# Altium PCB PCB1.PcbDoc
Units mm, origin at the board's own origin, x right, y up, seen from the top; angles counter-clockwise.
Board outline 135.89 x 111.51 mm, 2 copper layers (Top Layer, Bottom Layer); 33 components, 37 nets, 124 pads, 30 vias.
Unrouted connection lines stored in the file: 28.
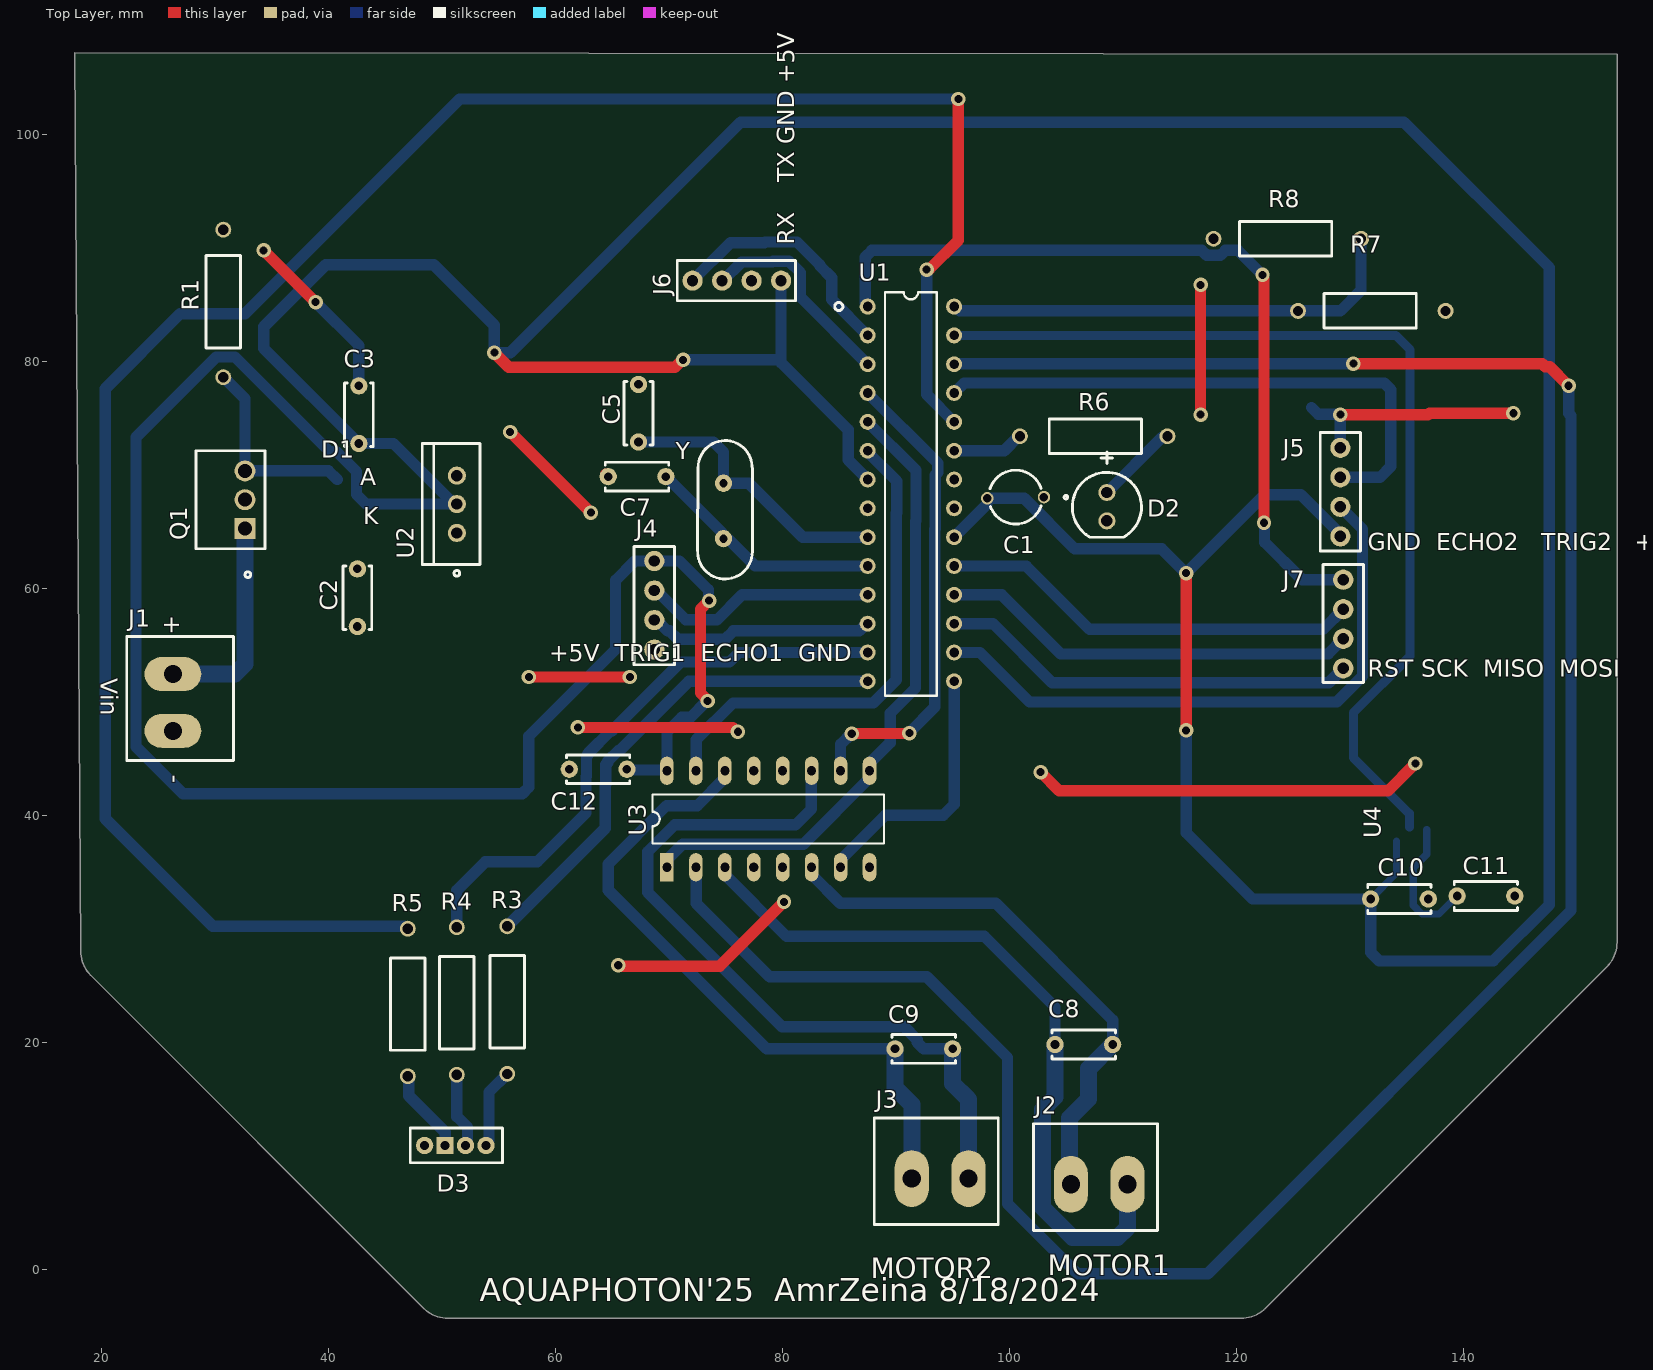
[diagram p0: Top Layer view]
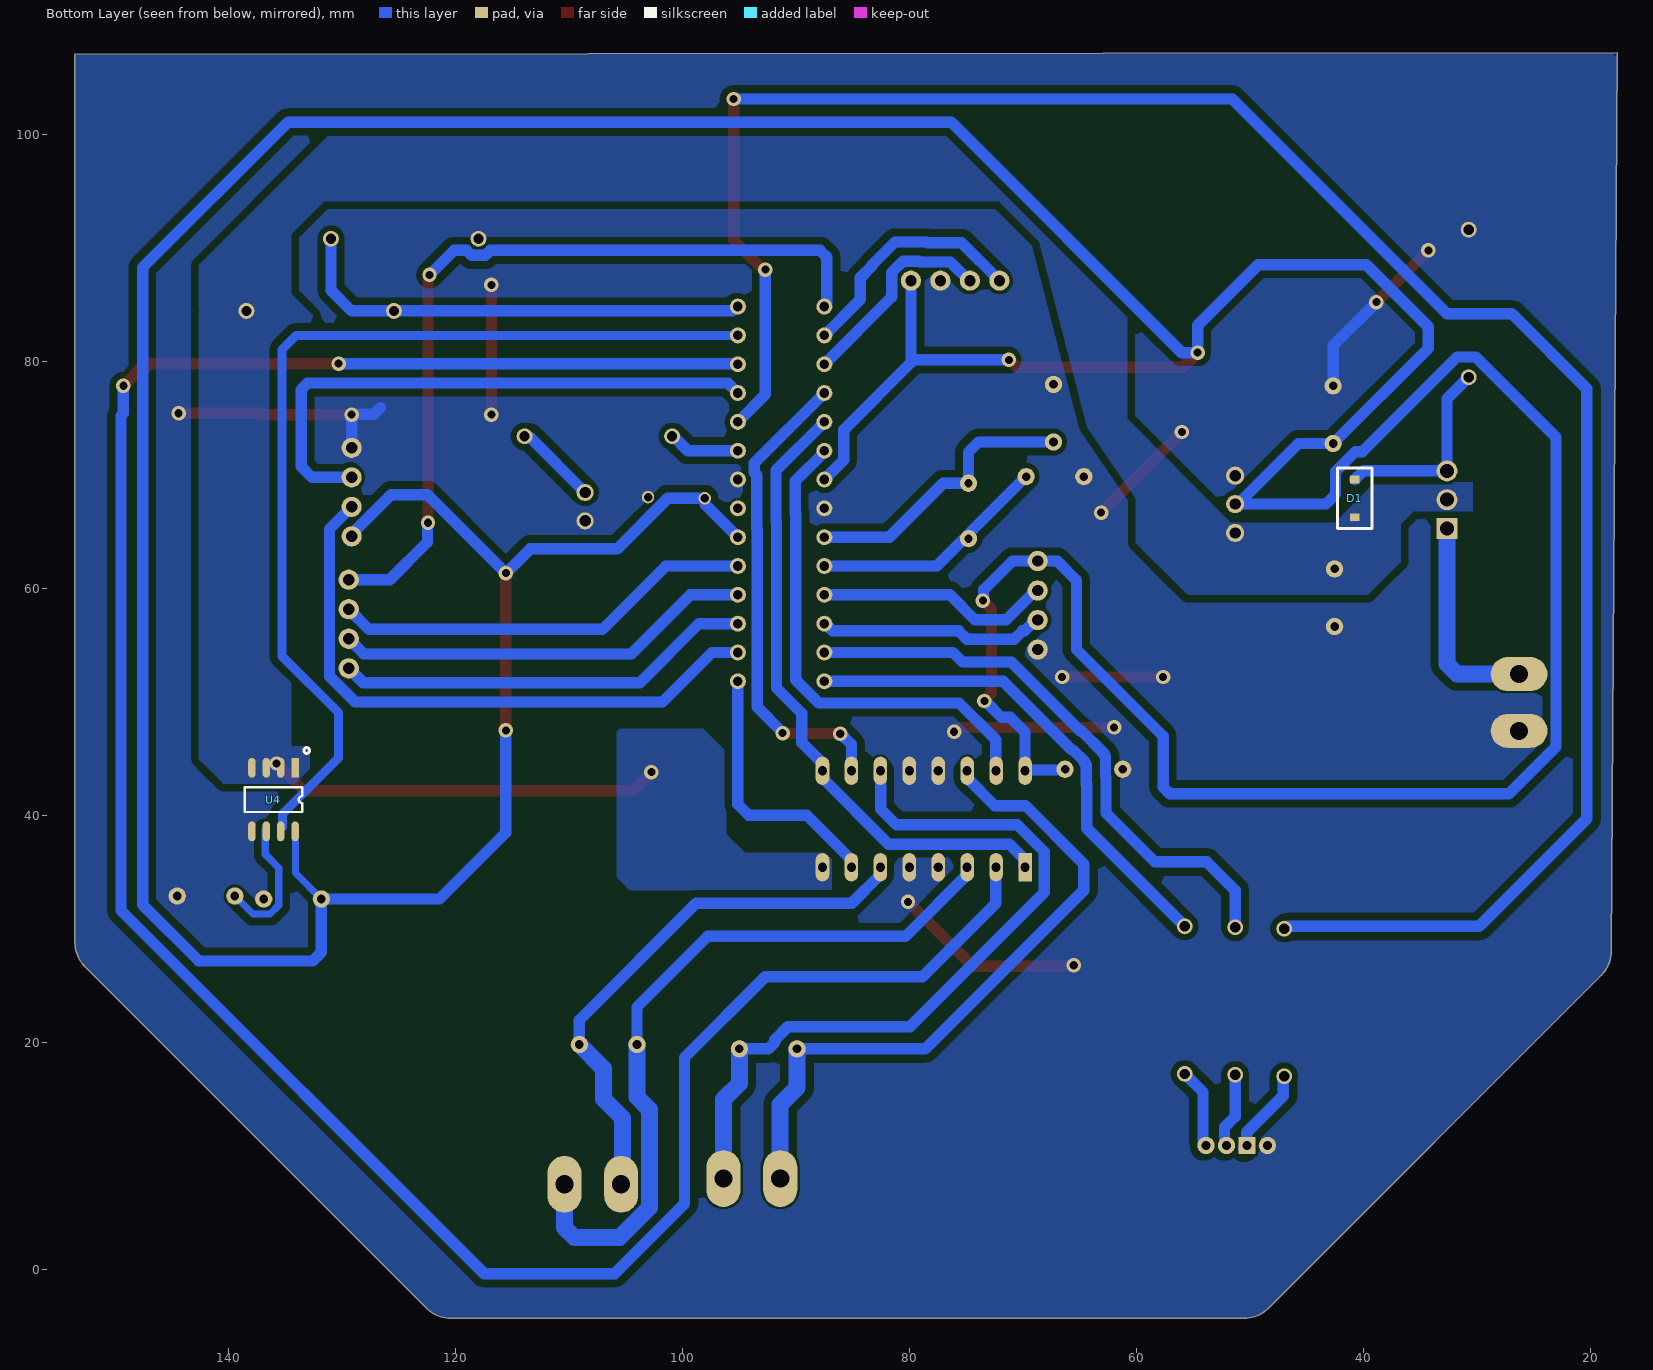
[diagram p1: Bottom Layer view, seen from below]
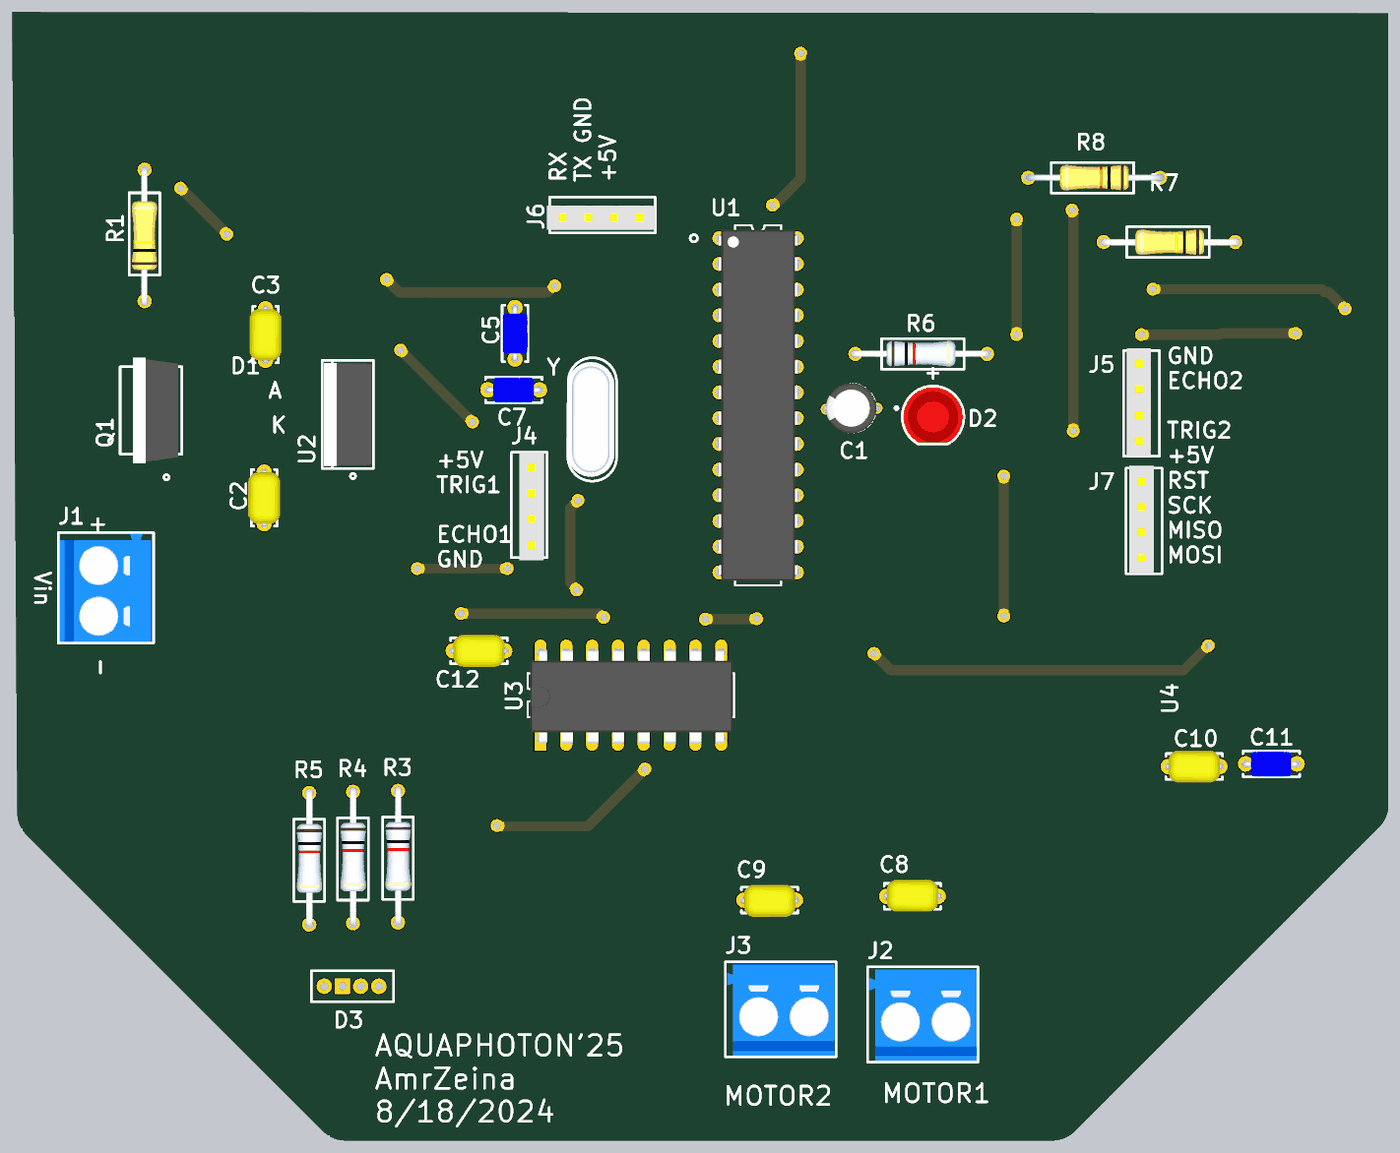
[diagram p2: 3D render of the assembled board from above, using the file's embedded part models]

## Layer stack, top to bottom
Top Solder: solder mask 0.0102, Solder Resist, Dk 3.5
Top Layer: signal copper 0.0356
Dielectric 1: dielectric 0.32, FR-4, Dk 4.8
Bottom Layer: signal copper 0.0356
Bottom Solder: solder mask 0.0102, Solder Resist, Dk 3.5

## Board outline
19.059,25.899 48.378,-3.42 ccw(c50.546,-1.252) 50.546,-4.318 120.396,-4.318 ccw(c120.396,-1.252) 122.564,-3.42 152.645,26.661 ccw(c150.477,28.829) 153.543,28.829 153.543,107.061 17.653,107.188 18.161,28.067 ccw(c21.227,28.067)

## Design rules (kind name [scope] priority, off if disabled: settings)
Clearance [All] p1: gap=0.254 ignorepadtopadclearanceinfootprint=FALSE except(0.2: THPad-Fill THPad-Poly THPad-Region; 0.7: Arc-Arc Arc-Track Arc-Fill Arc-Poly Arc-Region Track-Track Track-Fill Track-Poly Track-Region Fill-Fill Fill-Poly Fill-Region Poly-Poly Poly-Region Region-Region)
PlaneConnect [All] p1: planeconnectstyle=Direct reliefexpansion=0.508 reliefentries=4 reliefconductorwidth=0.254 reliefairgap=0.254
PolygonConnect [All] p1: connectstyle=Direct reliefconductorwidth=0.254 reliefentries=4 polygonreliefangle="90 Angle" airgapwidth=0.254
RoutingVias [All] p1: holewidth=0.711 width=1.27 viastyle="Through Hole" minholewidth=0.711 minwidth=1.27 maxholewidth=0.711 maxwidth=1.27
SolderMaskExpansion [All] p1: expansion=0.102 istentingtop=FALSE
SupplyNets "Schematic Supply Nets_5" [InNet('Vin')] p1: voltage=0.000
SupplyNets "Schematic Supply Nets_4" [InNet('VCC')] p2: voltage=0.000
SupplyNets "Schematic Supply Nets_2" [InNet('+5V')] p3: voltage=0.000
SupplyNets "Schematic Supply Nets" [InNet('GND')] p4: voltage=0.000
Width [All] p1: maxlimit=1.5 minlimit=0.635 preferedwidth=1 minimp=50.000000 maximp=50.000000 favimp=50.000000
29 further rules are at their usual default settings.

## Components (designator, comment, footprint, x,y, rotation, side; value= is the part's Value field where it differs from the comment)
C1 "CAP 10uF" "Cap 10uF" 103.044,68.047 r180 top
C2 "Cap 0.1uF" "CAP 0.1uF" 42.545,56.642 r90 top
C3 "Cap 0.1uF" "CAP 0.1uF" 42.672,77.851 r270 top
C5 "CAP 22pF" "Cap 22pF" 67.31,77.978 r270 top
C7 "CAP 22pF" "Cap 22pF" 64.643,69.85 r0 top
C8 "CAP 30pF" "CAP 30pF" 109.093,19.812 r180 top
C9 "CAP 30pF" "CAP 30pF" 89.916,19.431 r0 top
C10 "Cap 0.1uF" "CAP 0.1uF" 136.906,32.639 r180 top
C11 "CAP 1nF" "CAP 1nF" 144.526,32.893 r180 top
C12 "Cap 0.1uF" "CAP 0.1uF" 61.214,44.069 r0 top
D1 "1N5819 SMD Diode" "1N5819 SMD Diode" 40.767,76.454 r270 bottom
D2 "LED" LED 108.585,68.453 r270 top
D3 "RGB LED" "RGB LED" 48.47,10.922 r0 top
J1 "TerminalBlock 2pin" "Terminal Block 2pin" 17.145,51.689 r270 top
J2 "TerminalBlock 2pin" "Terminal Block 2pin" 106.172,-1.651 r0 top
J3 "TerminalBlock 2pin" "Terminal Block 2pin" 92.155,-1.143 r0 top
J4 "Headers 4pin" "Header 4pin" 68.707,62.442 r270 top
J5 "Headers 4pin" "Header 4pin" 129.159,64.558 r90 top
J6 "Headers 4pin" "Header 4pin" 79.901,87.122 r180 top
J7 "Headers 4pin" "Header 4pin" 129.413,52.941 r90 top
Q1 "IRF5305 P-MOSFET" IRF5305 32.766,65.278 r90 top
R1 "RES 100K" Res100K 30.734,91.613 r270 top
R3 "RES 1K" "Res 1K" 55.753,17.226 r90 top
R4 "RES 1K" "Res 1K" 51.308,17.145 r90 top
R5 "RES 1K" "Res 1K" 46.99,17.018 r90 top
R6 "RES 1K" "Res 1K" 113.919,73.406 r180 top
R7 "RES 30K" Res100K 125.43,84.455 r0 top
R8 "RES 10K" Res10K 117.983,90.805 r0 top
U1 "Atmega328p" "ATMega 328 P-PU - duplicate" 87.503,51.816 r0 top
U2 "LM7805" LM7805 51.308,64.887 r90 top
U3 "L293D" L293D 72.36,38.227 r90 top
U4 "CURRENT_SEN ACS712" Cuurent_sens 134.139,44.196 r270 bottom
Y "Crystal oscillator" "Crrystal 16MHZ" 74.803,64.389 r90 top

## Footprints (in the part's own frame and the unit in brackets; to place one, negate y for a bottom-side part, rotate by r counter-clockwise, add the part's x,y. Pads: shape width x height; smd on the part's side, far side on the other; paste and mask are expansions set on the pad)
"1N5819 SMD Diode" [mm]
  rect 0.7x0.8 smd: 1(6.858,0) 2(10.183,0)
  silkscreen extent 5.84,-1.52 11.18,1.52, body extent 6.81,-0.76 10.46,0.79, height 1.5
"ATMega 328 P-PU - duplicate" [mm]
  round 1.4 hole 0.85: 1(0,33.02) 2(0,30.48) 3(0,27.94) 4(0,25.4) 5(0,22.86) 6(0,20.32) 7(0,17.78) 8(0,15.24) 9(0,12.7) 10(0,10.16) 11(0,7.62) 12(0,5.08) 13(0,2.54) 14(0,0) 15(7.62,0) 16(7.62,2.54) 17(7.62,5.08) 18(7.62,7.62) 19(7.62,10.16) 20(7.62,12.7) 21(7.62,15.24) 22(7.62,17.78) 23(7.62,20.32) 24(7.62,22.86) 25(7.62,25.4) 26(7.62,27.94) 27(7.62,30.48) 28(7.62,33.02)
  silkscreen extent -2.9,-1.27 6.09,34.29, body extent -0.14,-0.83 7.76,33.85, height 4.57
"CAP 0.1uF" [mil]
  round 60 hole 30: 1(0,0) 2(200,0)
  silkscreen extent -10,-50 210,50, body extent -10,-62 210,63, height 231
"CAP 1nF" [mil]
  round 60 hole 30: 1(0,0) 2(200,0)
  silkscreen extent -10,-50 210,50, body extent -7,-48 210,50, height 217
"Cap 10uF" [mm]
  round 1.1 hole 0.75: 1(0,0) 2(5,0.102)
  silkscreen extent -2.08,-2.37 4.75,2.37, body extent -0.21,-2.5 5.29,2.5, height 12.5
"Cap 22pF" [mil]
  round 60 hole 30: 1(0,0) 2(200,0)
  silkscreen extent -10,-50 210,50, body extent -8,-49 208,49, height 217
"CAP 30pF" [mil]
  round 60 hole 30: 1(0,0) 2(200,0)
  silkscreen extent -10,-50 210,50, body extent -10,-65 210,60, height 231
"Crrystal 16MHZ" [mil]
  round 60 hole 28.74: 1(0,0) 2(192.13,0)
  silkscreen extent -140,-100 340,90, body extent -123,-92 323,92, height 256
Cuurent_sens [mm]
  rect 1.75x0.65 smd: 1(0,0)
  oval 1.75x0.65 smd: 2(0,-1.27) 3(0,-2.54) 4(0,-3.81) 5(5.6,-3.81) 6(5.6,-2.54) 7(5.6,-1.27) 8(5.6,0)
  silkscreen extent -1.78,-4.45 3.89,1.27, body extent -0.21,-4.48 5.79,0.42, height 1.75
"Header 4pin" [mil]
  round 70 hole 39.37: 1(1,0) 2(103.36,0) 3(205.72,0) 4(308.09,0)
  silkscreen extent -49,-70 361,70, body extent -49,-38 371,58, height 335
IRF5305 [mm]
  rect 1.845x1.845 hole 1.23: 1(0,0.127)
  round 1.845 hole 1.23: 2(2.54,0.127) 3(5.08,0.127)
  silkscreen extent -4.32,-1.65 6.86,4.45, body extent -2.67,-1.27 7.75,3.18, height 19.3
L293D [mm]
  rect 2.5x1.2 hole 0.8: 1(-2.794,2.54)
  oval 2.5x1.2 hole 0.8: 2(-2.794,-0.01) 3(-2.794,-2.56) 4(-2.794,-5.11) 5(-2.794,-7.66) 6(-2.794,-10.21) 7(-2.794,-12.76) 8(-2.794,-15.31) 9(5.706,-15.31) 10(5.706,-12.76) 11(5.706,-10.21) 12(5.706,-7.66) 13(5.706,-5.11) 14(5.706,-2.56) 15(5.706,-0.01) 16(5.706,2.54)
  silkscreen extent -0.71,-16.58 3.62,3.81, body extent -3.3,-16.44 5.94,3.56, height 5.1
LED [mm]
  round 1.5 hole 1: 1(0,0) 2(2.5,0)
  silkscreen extent -3.56,-3.05 3.95,3.05, body extent -1.66,-2.95 3.77,2.95, height 10.6
LM7805 [mm]
  round 1.6 hole 1: 1(0,0) 2(2.55,0) 3(5.05,0)
  silkscreen extent -3.81,-2.03 7.87,3.05, body extent -2.54,-1.84 7.62,2.86, height 19.81
Res10K [mm]
  round 1.4 hole 0.9: 1(0,0) 2(13,0)
  silkscreen extent 2.29,-1.52 10.41,1.52, body extent -0.2,-1.23 13.4,1.27, height 4.04
Res100K [mm]
  round 1.4 hole 0.9: 1(0,0) 2(13,0)
  silkscreen extent 2.29,-1.52 10.41,1.52, body extent -0.2,-1.27 13.4,1.23, height 4.04
"Res 1K" [mm]
  round 1.4 hole 0.9: 1(0,0) 2(13,0)
  silkscreen extent 2.29,-1.52 10.41,1.52, body extent -0.2,-1.27 13.4,1.23, height 4.04
"RGB LED" [mil]
  round 60 hole 31.5: 1(0,0) 3(141.73,0) 4(212.6,0)
  rect 60x60 hole 31.5: 2(70.87,0)
  silkscreen extent -50,-60 270,60
"Terminal Block 2pin" [mm]
  oval 3x5 hole 1.6: 1(-0.762,9.144) 2(4.238,9.144)
  silkscreen extent -4.06,5.08 6.86,14.48, body extent -3.9,5.22 6.7,14.22, height 12.6

## Part data
R7: library part "RES 100K"
U4: library part "CURRENT_MOD ACS712"

## Via types
v1: diameter 1.27, hole 0.711, Top Layer to Bottom Layer, 30 vias

## Nets (pads, with @x,y where several pads share a name; then routed paths per layer and width w, separated by ;. In a path a pad name is that pad's centre, name@x,y a point inside that pad or via, vN(x,y) a via of type N, cw(c..) or ccw(c..) an arc to the next point about the centre after c; other vN are vias at no path point)
+5V: C1.2 C3.2 C10.2 C12.2 J4.1 J5.1 J6.1 U1.7 U1.20 U2.2 U3.16 U4.8 | length 529
  Top Layer w1: v1(54.61,80.772) 55.888,79.494 70.531,79.494 71.174,80.137 v1(71.247,80.137) ; v1(73.407,50.079) 73.407,50.152 72.771,50.788 72.771,58.166 v1(73.533,58.928) ; v1(115.57,47.498) v1(115.57,61.341)
  Bottom Layer w0.635: C10.2 134.112,34.925 U4.8@134.112,37.747
  Bottom Layer w1: U2.2 U2.2@51.054,67.437 ; C12.2 66.362,44.001 69.752,44.001 U3.16 69.82,47.341 71.119,48.64 71.895,48.64 73.334,50.079 v1(73.407,50.079) ; v1@71.32,80.137 79.876,80.137 ; v1(73.533,58.928) 73.481,58.98 73.481,59.869 70.933,62.417 J4.1 66.989,62.417 65.285,60.713 65.285,54.617 57.658,46.99 57.658,42.496 57.072,41.91 27.178,41.91 23.035,46.053 23.035,73.318 30.106,80.39 31.751,80.39 40.083,72.058 40.709,72.058 42.467,70.3 42.467,68.277 43.307,67.437 U2.2@51.054,67.437 ; J6.1 79.876,79.899 85.803,73.972 85.803,71.324 87.503,69.624 U1.7 ; U1.20 C1.2@98.025,67.418 ; C1.2 101.301,67.945 105.746,63.5 113.411,63.5 v1(115.57,61.341) 122.492,68.263 125.666,68.263 129.159,64.77 J5.1 ; v1(115.57,47.498) 115.57,38.481 121.412,32.639 C10.2 131.826,27.94 132.588,27.178 142.621,27.178 147.574,32.131 147.574,88.265 134.747,101.092 76.327,101.092 56.007,80.772 v1(54.61,80.772) 54.61,83.185 49.27,88.525 39.757,88.525 34.29,83.058 34.29,81.153 C3.2 45.72,72.771 50.754,67.737 50.846,67.737 51.054,67.529 U2.2@51.054,67.437
BLUE: R3.2 U1.14 | length 44
  Bottom Layer w1: R3.2 64.389,38.862 64.389,42.696 64.43,42.737 64.43,44.491 64.594,44.655 64.594,44.773 65.59,45.769 65.708,45.769 71.755,51.816 U1.14
CUR_SIG: U1.27 U4.7 | length 86.9
  Bottom Layer w0.8: U1.27 134.034,82.296 135.304,81.026 135.304,54.049 130.302,49.047 130.302,45.085 135.234,40.153 U4.7@135.234,38.971
ECHO1: J4.3 U1.12 | length 20.1
  Bottom Layer w1: J4.3 68.918,57.217 69.874,56.261 70.055,56.261 70.788,55.528 74.941,55.528 75.674,56.261 86.76,56.261 87.395,56.896 U1.12
ECHO2: J5.3 U1.25 | length 50.9
  Bottom Layer w1: U1.25 96.012,78.105 133.018,78.105 133.604,77.519 133.604,70.739 132.648,69.783 J5.3 J5.3@129.308,69.932
EN: U1.5 U3.1 U3.9 | length 56.3
  Bottom Layer w1: U3.1 69.92,35.533 69.92,36.183 71.202,37.465 81.852,37.465 87.67,43.283 87.67,44.529 87.735,44.594 87.735,44.648 89.486,46.399 89.486,48.991 91.723,51.228 91.723,65.924 91.772,65.973 91.772,70.407 U1.5
GND: C1.1 C2.1 C3.1 C5.1 C7.1 C10.1 C11.1 C12.1 D2.2 D3.1 J1.2 J4.4 J5.4 J6.2 R1.1 R8.1 U1.8 U1.22 U2.3 U3.4 U3.5 U3.12 U3.13 U4.5 | length 98.4
  Top Layer w1: v1(34.29,89.789) v1(38.858,85.221) ; v1(56.007,73.787) v1(63.119,66.675) ; v1(57.658,52.197) v1(66.548,52.197) ; v1(61.976,47.752) 75.619,47.752 76,47.371 v1(76.073,47.371) ; C7.1@64.441,70.073 64.643,69.871 C7.1 ; v1(65.532,26.797) 65.731,26.797 65.808,26.721 74.473,26.721 v1(80.137,32.385) ; v1(116.84,75.311) v1(116.84,86.741) ; v1(129.159,75.311) 136.88,75.311 137.007,75.438 v1(144.399,75.438)
  Bottom Layer w1: v1(38.858,85.221) 42.672,81.407 C3.1 42.643,77.851 C3.1@42.601,77.808 ; 126.619,75.946 127.202,75.363 129.107,75.363 v1(129.159,75.311) J5.4
GREEN: R4.2 U1.13 | length 51.1
  Bottom Layer w1: R4.2 51.308,33.401 53.811,35.904 58.383,35.904 62.689,40.21 62.689,43.4 62.73,43.441 62.73,45.204 62.894,45.368 62.894,45.477 64.886,47.469 64.995,47.469 71.042,53.516 75.333,53.516 76.173,54.356 U1.13
IN1: U1.26 U3.2 | length 215.9
  Top Layer w1: v1(130.302,79.805) 146.944,79.805 147.219,79.53 147.603,79.53 v1(149.274,77.859)
  Bottom Layer w1: U3.2 72.39,35.413 72.39,32.258 78.867,25.781 92.71,25.781 99.822,18.669 99.822,5.782 105.985,-0.381 117.466,-0.381 149.479,31.632 149.479,75.224 149.274,75.429 v1(149.274,77.859) ; U1.26 95.172,79.805 v1(130.302,79.805)
IN2: U1.15 U3.7 | length 23.5
  Bottom Layer w1: U3.7 85.12,36.083 89.042,40.005 94.156,40.005 95.123,40.972 U1.15
IN3: U1.4 U3.10 | length 42.4
  Top Layer w1: v1(86.106,47.195) 86.131,47.219 91.161,47.219 v1(91.186,47.244)
  Bottom Layer w1: U3.10 85.12,46.258 86.057,47.195 v1(86.106,47.195) ; U1.4 93.681,71.038 93.681,70.21 93.472,70.001 93.472,65.269 93.423,65.22 93.423,49.554 91.186,47.317 v1(91.186,47.244)
IN4: U1.6 U3.15 | length 43.8
  Bottom Layer w1: U3.15 72.408,43.971 72.408,46.676 75.643,49.911 88.002,49.911 90.023,51.932 90.023,66.628 90.072,66.677 90.072,69.459 87.503,72.028 U1.6
LED_ind: R6.2 U1.23 | length 6.3
  Bottom Layer w1: U1.23 99.541,72.136 100.811,73.406 R6.2
MISO: J7.2 U1.18 | length 37
  Bottom Layer w1: U1.18 99.314,59.436 104.521,54.229 128.076,54.229 J7.2
MOSI: J7.1 U1.17 | length 37
  Bottom Layer w1: U1.17 98.552,56.896 103.759,51.689 128.136,51.689 J7.1
NetC5_2: C5.2 U1.9 Y.2 | length 25.3
  Bottom Layer w1: C5.2 73.914,72.898 74.803,72.009 Y.2 77.035,69.269 81.788,64.516 U1.9
NetC7_2: C7.2 U1.10 Y.1 | length 21.3
  Bottom Layer w1: C7.2 74.703,64.87 74.703,64.489 74.903,64.289 75.284,64.289 77.597,61.976 U1.10
NetC11_2: C11.2 U4.6 | length 12
  Bottom Layer w0.635: U4.6@136.779,38.735 136.779,36.576 135.572,35.369 135.572,32.087 136.354,31.305 137.858,31.305 C11.2
NetD1_1: D1.1 Q1.3 R1.2 | length 17.6
  Bottom Layer w1: R1.2@30.811,78.69 R1.2 32.639,76.708 Q1.3 40.005,70.358 D1.1
NetD2_1: D2.1 R6.1 | length 7.4
  Bottom Layer w1: D2.1 113.461,73.329 113.842,73.329 R6.1
NetD3_2: D3.2 R5.1 | length 7.8
  Bottom Layer w1: R5.1 47.067,16.941 47.067,15.299 50.284,12.082 50.284,10.93 D3.2@50.546,10.668
NetD3_3: D3.3 R4.1 | length 6.8
  Bottom Layer w1: R4.1 51.308,13.462 52.246,12.524 D3.3@52.246,10.768
NetD3_4: D3.4 R3.1 | length 7.2
  Bottom Layer w1: D3.4@54.052,10.762 53.97,10.844 53.97,11.164 54.146,11.34 54.146,15.619 R3.1
OUT1: C8.2 J2.2 U3.3 | length 65.5
  Bottom Layer w1: U3.3 74.92,34.783 80.366,29.337 97.79,29.337 104.013,23.114 C8.2
  Bottom Layer w1.5: C8.2 104.013,15.176 102.906,14.069 102.906,5.456 105.568,2.794 109.531,2.794 110.41,3.673 J2.2
OUT2: C8.1 J2.1 U3.6 | length 48.6
  Bottom Layer w1: U3.6 82.57,34.783 85.095,32.258 98.806,32.258 109.093,21.971 C8.1
  Bottom Layer w1.5: J2.1 105.283,7.62 105.283,13.335 106.967,15.019 106.967,17.68 109.093,19.806 C8.1
OUT3: C9.2 J3.2 U3.11 | length 67.7
  Bottom Layer w1: U3.11 82.57,43.922 82.677,43.815 82.55,43.688 82.55,40.567 81.148,39.165 70.498,39.165 68.12,36.787 68.12,33.226 79.965,21.381 90.724,21.381 91.866,20.239 91.866,20.017 92.452,19.431 C9.2
  Bottom Layer w1.5: C9.2 94.996,16.383 96.393,14.986 J3.2
OUT4: C9.1 J3.1 U3.14 | length 59.5
  Bottom Layer w1: U3.14 74.92,43.283 72.502,40.865 69.794,40.865 64.643,35.714 64.643,33.401 78.613,19.431 C9.1
  Bottom Layer w1.5: C9.1 89.916,16.002 91.393,14.525 J3.1
RED: R5.2 U1.24 | length 185.1
  Top Layer w1: v1(92.71,88.089) 92.762,88.141 92.967,88.141 95.504,90.678 v1(95.504,103.124)
  Bottom Layer w1: R5.2 46.882,30.018 46.674,30.226 29.796,30.226 20.32,39.702 20.32,77.597 26.924,84.201 32.639,84.201 51.562,103.124 v1(95.504,103.124) ; v1(92.71,88.089) 92.71,77.089 U1.24
Reset: J7.4 U1.1 | length 72.9
  Top Layer w1: v1(122.301,87.63) 122.353,87.578 122.353,87.387 122.428,87.312 v1(122.428,65.786)
  Bottom Layer w1: U1.1 87.503,84.944 87.29,85.157 87.29,89.203 87.876,89.789 116.943,89.789 117.381,89.351 118.585,89.351 119.023,89.789 120.142,89.789 v1(122.301,87.63) ; v1(122.428,65.786) 122.48,65.734 122.48,64.083 125.797,60.766 J7.4
RX: J6.4 U1.2 | length 21.4
  Bottom Layer w1: J6.4 75.419,90.465 78.411,90.465 78.468,90.522 81.284,90.522 83.276,88.53 83.276,88.45 84.344,87.382 84.344,85.455 U1.2
SCK: J7.3 U1.19 | length 37.3
  Bottom Layer w1: U1.19 101.473,61.976 107.061,56.388 127.635,56.388 J7.3
TRIG1: J4.2 U1.11 | length 20.8
  Bottom Layer w1: J4.2 68.903,59.817 71.492,57.228 74.237,57.228 76.445,59.436 U1.11
TRIG2: J5.2 U1.16 | length 54.5
  Bottom Layer w1: U1.16 97.409,54.356 101.776,49.989 128.84,49.989 131.113,52.262 131.113,65.229 J5.2
TX: J6.3 U1.3 | length 18.5
  Bottom Layer w1: J6.3 74.769,87.122 76.412,88.765 79.115,88.765 79.172,88.822 80.58,88.822 81.576,87.826 81.576,85.683 U1.3
VCC: C2.2 D1.2 Q1.2 R7.2 U2.1 U3.8 U4.1 U4.2 U4.3 U4.4 | length 34.7
  Top Layer w1: v1(102.743,43.815) 104.394,42.164 133.35,42.164 v1(135.763,44.577)
Vin: J1.1 Q1.1 | length 18.7
  Bottom Layer w1.5: J1.1 31.76,52.451 32.639,53.33 Q1.1
VOLT_SIG: R7.1 R8.2 U1.28 | length 41.3
  Bottom Layer w1: U1.28 95.231,84.836 95.612,84.455 R7.1 129.159,84.455 130.983,86.279 R8.2
pads on no net: U1.21

## Polygon pours and split planes (outlines as drawn)
GND on Bottom Layer "GND" (solid, remove dead copper, pour order 23): 19.059,25.899 48.378,-3.42 ccw(c50.546,-1.252) 50.546,-4.318 120.396,-4.318 ccw(c120.396,-1.252) 122.564,-3.42 152.645,26.661 ccw(c150.477,28.829) 153.543,28.829 153.543,107.061 17.653,107.188 18.161,28.067 ccw(c21.227,28.067)
VCC on Bottom Layer "VCC_L02_P020" (solid, pour order 20): 30.353,69.342 30.353,66.802 35.56,66.802 36.703,65.659 36.703,62.357 39.624,59.436 55.499,59.436 60.071,64.008 60.071,67.945 64.389,74.295 68.58,90.551 72.136,94.107 131.572,94.107 134.493,91.186 134.493,85.979 132.08,83.566 128.27,83.566 128.27,81.153 128.143,81.026 134.493,81.026 134.493,46.101 132.969,46.101 132.842,46.228 132.842,43.307 133.35,42.799 140.462,42.799 142.621,44.958 142.621,97.663 140.462,99.822 74.549,99.822 60.833,86.106 60.833,74.93 51.689,65.786 42.545,65.786 38.989,69.342
VCC on Bottom Layer "VCC_L02_P019" (solid, pour order 19): 86.868,33.401 104.648,33.401 105.791,34.544 105.791,47.371 105.537,47.625 98.171,47.625 96.139,45.593 96.139,38.354 94.488,36.703 86.868,36.703

## Silkscreen, mask and mechanical layers (free items; w line width, h text height)
Top Overlay:
  text "RX    TX GND +5V" at 81.026,90.297 h1.52 r90
  text "A" at 42.799,69.088 h1.52
  text "K" at 43.053,65.659 h1.52
  text "GND  ECHO2   TRIG2   +5V" at 131.572,63.373 h1.52
  text "+" at 25.527,57.658 h1.52 r270
  text "+5V  TRIG1  ECHO1  GND" at 59.436,53.594 h1.52
  text "RST SCK  MISO  MOSI" at 131.572,52.197 h1.52
  text "Vin" at 19.939,52.07 h1.52 r270
  text "-" at 25.781,43.561 h1.52 r270
  text "MOTOR1" at 103.378,-0.508 h1.8
  text "MOTOR2" at 87.757,-0.762 h1.8
  text "AQUAPHOTON'25  AmrZeina 8/18/2024" at 53.34,-2.794 h2.03
Mechanical 1:
  lines w0.254: 17.653,107.188 153.543,107.061 153.543,32.258 153.543,28.829 cw(c150.477,28.829) 152.645,26.661 122.564,-3.42 cw(c120.396,-1.252) 120.396,-4.318 50.546,-4.318 cw(c50.546,-1.252) 48.378,-3.42 19.059,25.899 cw(c21.227,28.067) 18.161,28.067 17.653,107.188